# Altium PCB circuit_1.PcbDoc
Units mil, origin at the board's own origin, x right, y up, seen from the top; angles counter-clockwise.
Board outline 6000 x 4000 mil, 2 copper layers (Top Layer, Bottom Layer); 8 components, 7 nets, 27 pads, 0 vias.
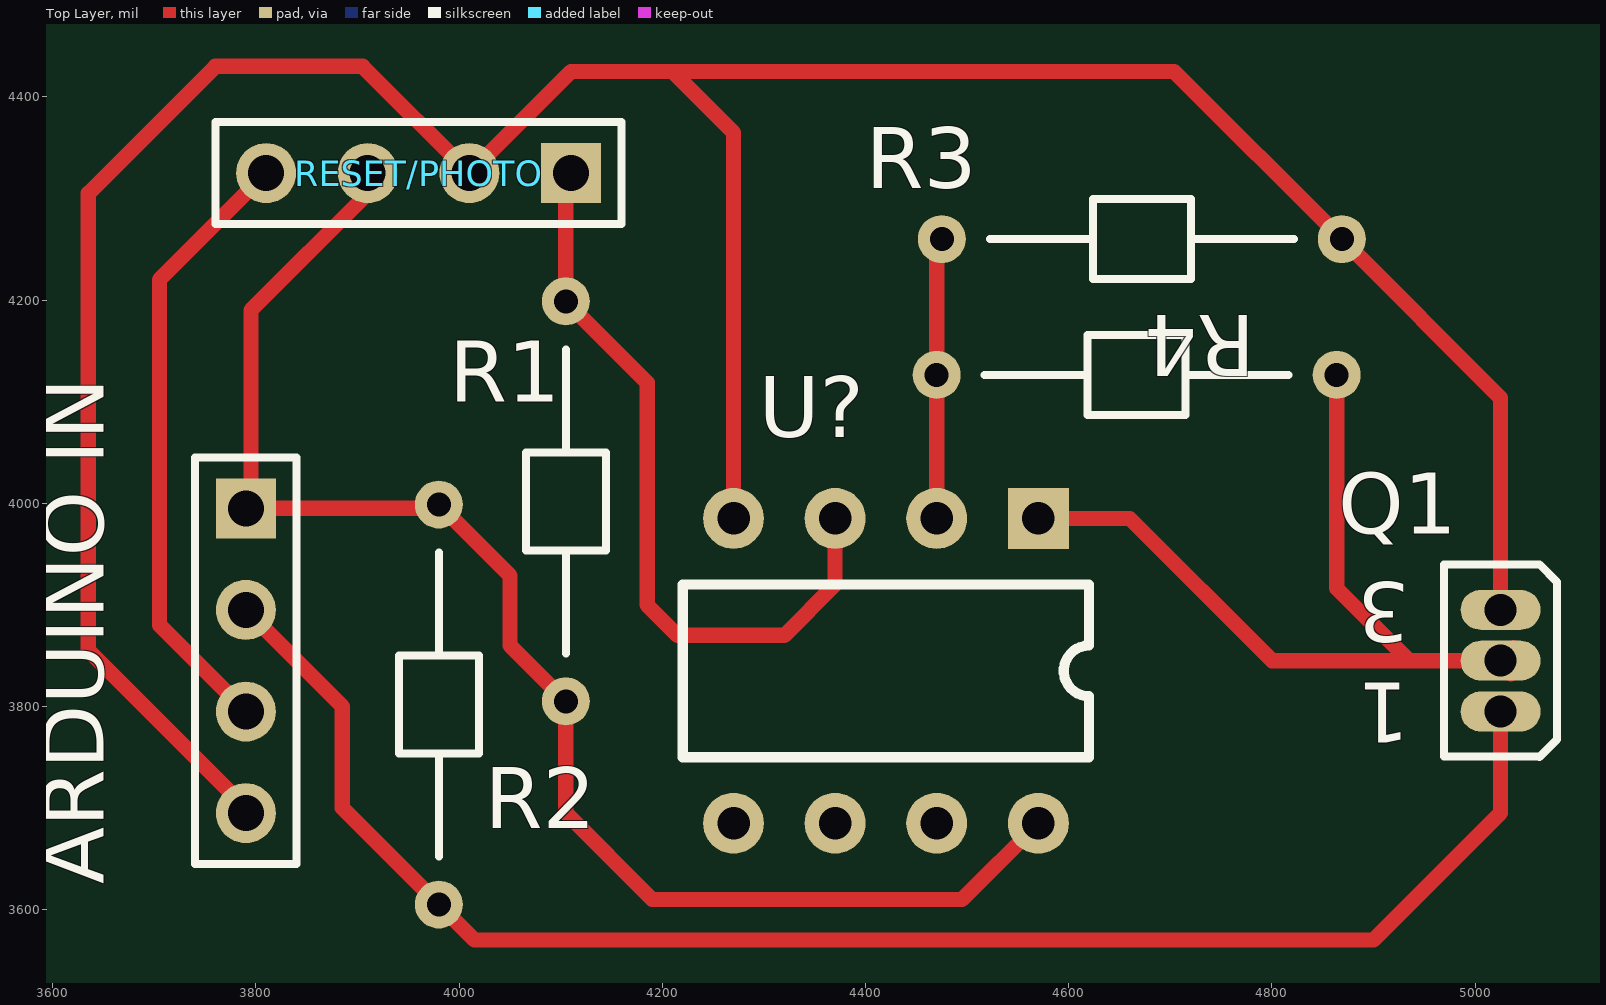
[diagram p0: Top Layer view]
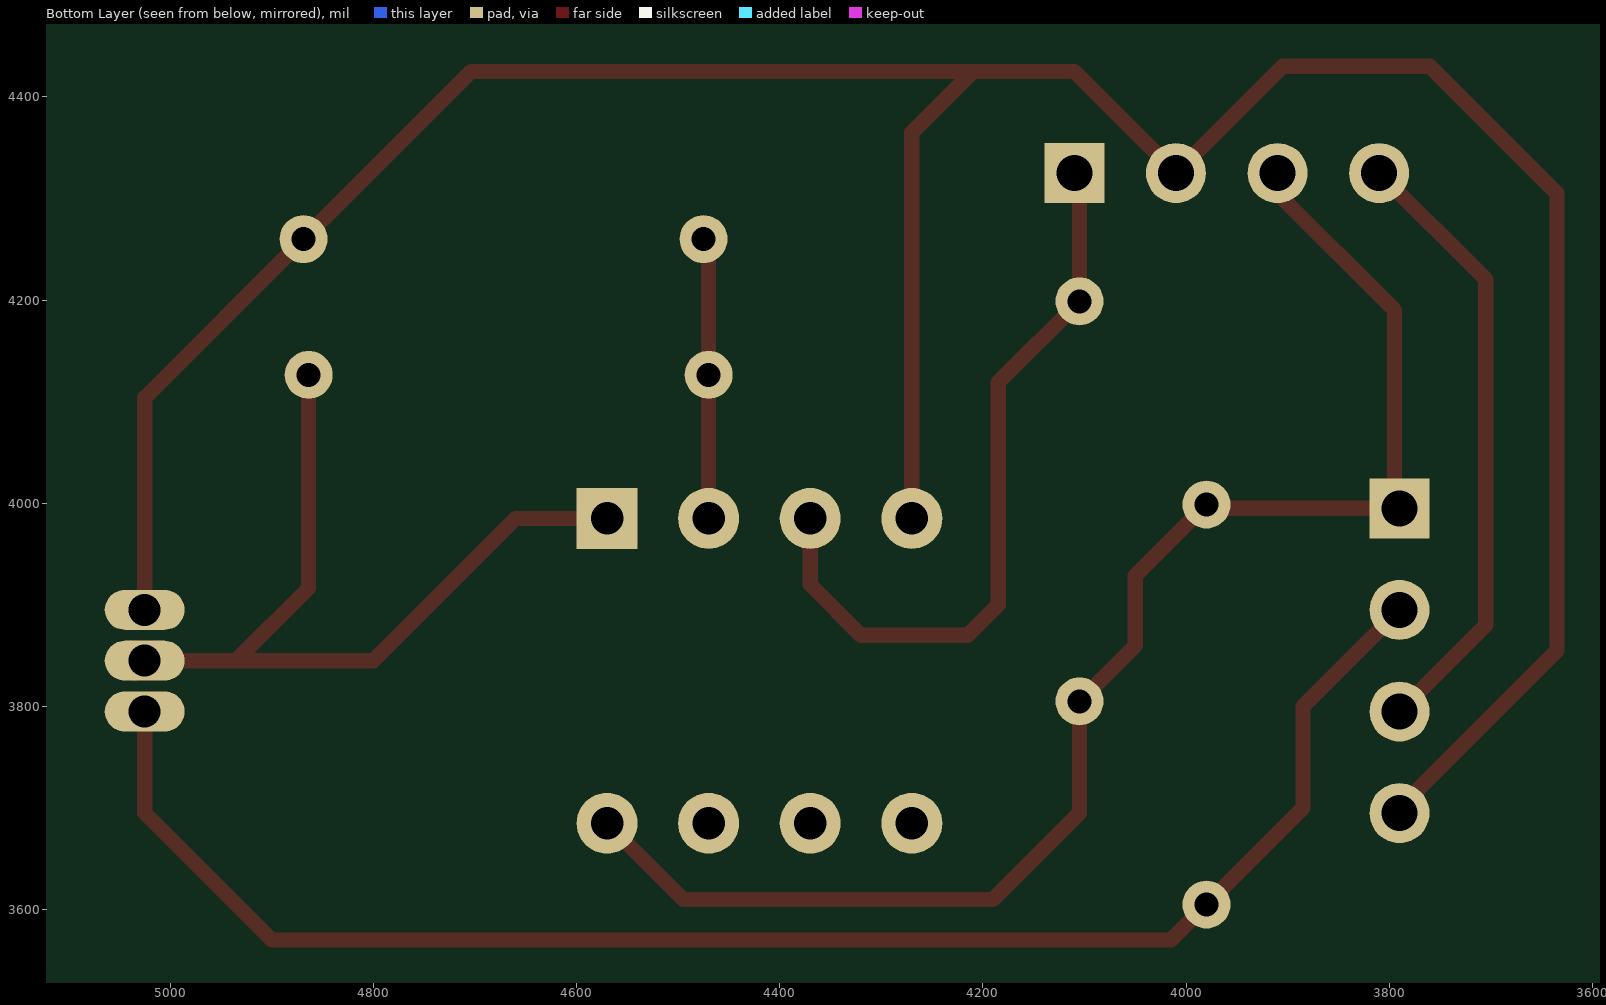
[diagram p1: Bottom Layer view, seen from below]

## Layer stack, top to bottom
Top Solder: solder mask 0.4, Solder Resist, Dk 3.5
Top Layer: signal copper 1.4
Dielectric 1: dielectric 12.6, FR-4, Dk 4.8
Bottom Layer: signal copper 1.4
Bottom Solder: solder mask 0.4, Solder Resist, Dk 3.5

## Board outline
1000,1000 7000,1000 7000,5000 1000,5000

## Design rules (kind name [scope] priority, off if disabled: settings)
Clearance [All] p1: gap=10 ignorepadtopadclearanceinfootprint=FALSE except(0: Arc-Hole Track-Hole SMDPad-Hole THPad-Hole Via-Hole Fill-Hole Poly-Hole Region-Hole Text-Hole)
PolygonConnect [All] p1: connectstyle=Relief reliefconductorwidth=10 reliefentries=4 polygonreliefangle="90 Angle" airgapwidth=10
RoomDefinition circuit_1 [InComponentClass('circuit_1')] p1: confinementstyle=ConfineIn formatcopy=TRUE lockcomponents=FALSE outline 0,0 2000,0 2000,1000 0,1000
RoutingVias [All] p1: holewidth=28 width=50 viastyle="Through Hole" minholewidth=28 minwidth=50 maxholewidth=28 maxwidth=50
SolderMaskExpansion [All] p1: expansion=4
Width [All] p1: maxlimit=15 minlimit=10 preferedwidth=15
30 further rules are at their usual default settings.

## Components (designator, comment, footprint, x,y, rotation, side; value= is the part's Value field where it differs from the comment)
"ARDUINO IN" "Header 4" HDR1X4 3790,3995 r270 top
Q1 "MOSFET-N" E3 5025,3845 r180 top
R1 "Resistor" RES 4105,4198.7 r270 top value=47K
R2 "Resistor" RES 3980,3605 r90 top value=10K
R3 "Resistor" RES 4863.7,4126.3 r180 top value=2K
R4 "Resistor" RES 4868.7,4260 r180 top value=1.5K
RESET/PHOTO "Header 4" HDR1X4 4110,4325 r180 top
U? "UA1458TC" PDIP8 4570,3985 r270 top

## Footprints (in the part's own frame and the unit in brackets; to place one, negate y for a bottom-side part, rotate by r counter-clockwise, add the part's x,y. Pads: shape width x height; smd on the part's side, far side on the other; paste and mask are expansions set on the pad)
E3 [mm] "TO, Flat Index; 3 In-Line, Axial Leads; Body Dia. 4.6mm; Lead Dia. 0.5 mm (max)"
  oval 2x1 hole 0.8: 1(0,1.27) 2(0,0) 3(0,-1.27)
  silkscreen extent -1.41,-2.41 1.41,2.41
HDR1X4 [mm] "Connector; Header; 4 Position"
  rect 1.5x1.5 hole 0.9: 1(0,0)
  round 1.5 hole 0.9: 2(2.54,0) 3(5.08,0) 4(7.62,0)
  silkscreen extent -1.27,-1.27 8.89,1.27
PDIP8 [mil]
  rect 60x60 hole 32: 1(0,0)
  round 60 hole 32: 2(0,-100) 3(0,-200) 4(0,-300) 5(300,-300) 6(300,-200) 7(300,-100) 8(300,0)
  silkscreen extent 65,-350 235,50
RES [mm]
  round 1.2 hole 0.6: 1(0,0) 2(10,0)
  silkscreen extent 1.2,-1 8.8,1

## Part data
"ARDUINO IN" RESET/PHOTO: "Header, 4-Pin", LatestRevisionDate=17-Jul-2002, LatestRevisionNote="Re-released for DXP Platform.", Publisher="Altium Limited"
Q1: "N-Channel MOSFET", LatestRevisionDate=17-Jul-2002, LatestRevisionNote="Re-released for DXP Platform.", PackageDescription="TO, Flat Index; 3 In-Line, Axial Leads; Body Dia. 4.6mm; Lead Dia. 0.5 mm (max)", PackageReference=E3, PackageVersion=1995/1996, Published=8-Jun-2000, Publisher="Altium Limited"
U?: "Dual opamp"

## Nets (pads, with @x,y where several pads share a name; then routed paths per layer and width w, separated by ;. In a path a pad name is that pad's centre, name@x,y a point inside that pad or via, vN(x,y) a via of type N, cw(c..) or ccw(c..) an arc to the next point about the centre after c; other vN are vias at no path point)
"NetARDUINO IN_1": "ARDUINO IN.1" R1.2 R2.2 RESET/PHOTO.3 U?.8 | length 1458
  Top Layer w15: RESET/PHOTO.3 3910,4305 3795,4190 3795,4000 3790,3995 3976.3,3995 R2.2 4050,3928.7 4050,3860 R1.2 4105,3695 4190,3610 4495,3610 U?.8
"NetARDUINO IN_2": "ARDUINO IN.2" Q1.1 R2.1 | length 1580
  Top Layer w15: 3790,3895 3885,3800 3885,3700 R2.1 4015,3570 4900,3570 5025,3695 Q1.1
"NetARDUINO IN_3": "ARDUINO IN.3" RESET/PHOTO.4 | length 608.7
  Top Layer w15: 3790,3795 3705,3880 3705,4220 RESET/PHOTO.4
"NetARDUINO IN_4": "ARDUINO IN.4" Q1.3 R4.1 RESET/PHOTO.2 U?.4 | length 3019.8
  Top Layer w15: 3790,3695 3790,3700 3635,3855 3635,4305 3760,4430 3905,4430 RESET/PHOTO.2 ; RESET/PHOTO.2@4015,4320 RESET/PHOTO.2 ; U?.4@4256.3,3973.7 U?.4@4260,3970 ; U?.4 4270,4365 4210,4425 ; Q1.3 5025,4103.7 R4.1 4703.7,4425 4210,4425 ; RESET/PHOTO.2 4110,4425 4210,4425
NetQ1_2: Q1.2 R3.1 U?.1 | length 858.9
  Top Layer w15: U?.1 4660,3985 4800,3845 4935,3845 ; R3.1 4863.7,3916.3 4935,3845 ; Q1.2@5035,3832.18 5035,3835 Q1.2 ; Q1.2@5037.81,3857.82 Q1.2 ; 4935,3845 Q1.2
NetR1_1: R1.1 RESET/PHOTO.1 U?.3 | length 743.3
  Top Layer w15: RESET/PHOTO.1 4105,4320 R1.1 4185,4118.7 4185,3900 4215,3870 4320,3870 4370,3920 U?.3
NetR3_2: R3.2 R4.2 U?.2 | length 278.9
  Top Layer w15: U?.2@4471.3,3986.3 U?.2 R3.2 4470,4255 R4.2
pads on no net: U?.5 U?.6 U?.7

## Silkscreen, mask and mechanical layers (free items; w line width, h text height)
Mechanical 1:
  lines w10: 3380,3275 3390,3265 5275,3265 5275,4740 5270,4745 3390,4745 3380,4735 3380,3275

## Text inside footprints (layer, text, board x,y; h text height)
Q1: Top Overlay "1" at 4935.43,3823.15 h59.05 r180; Top Overlay "3" at 4935.43,3922.28 h59.05 r180